# EAGLE board carte_moteurs_robotech (EAGLE 8.5.2)
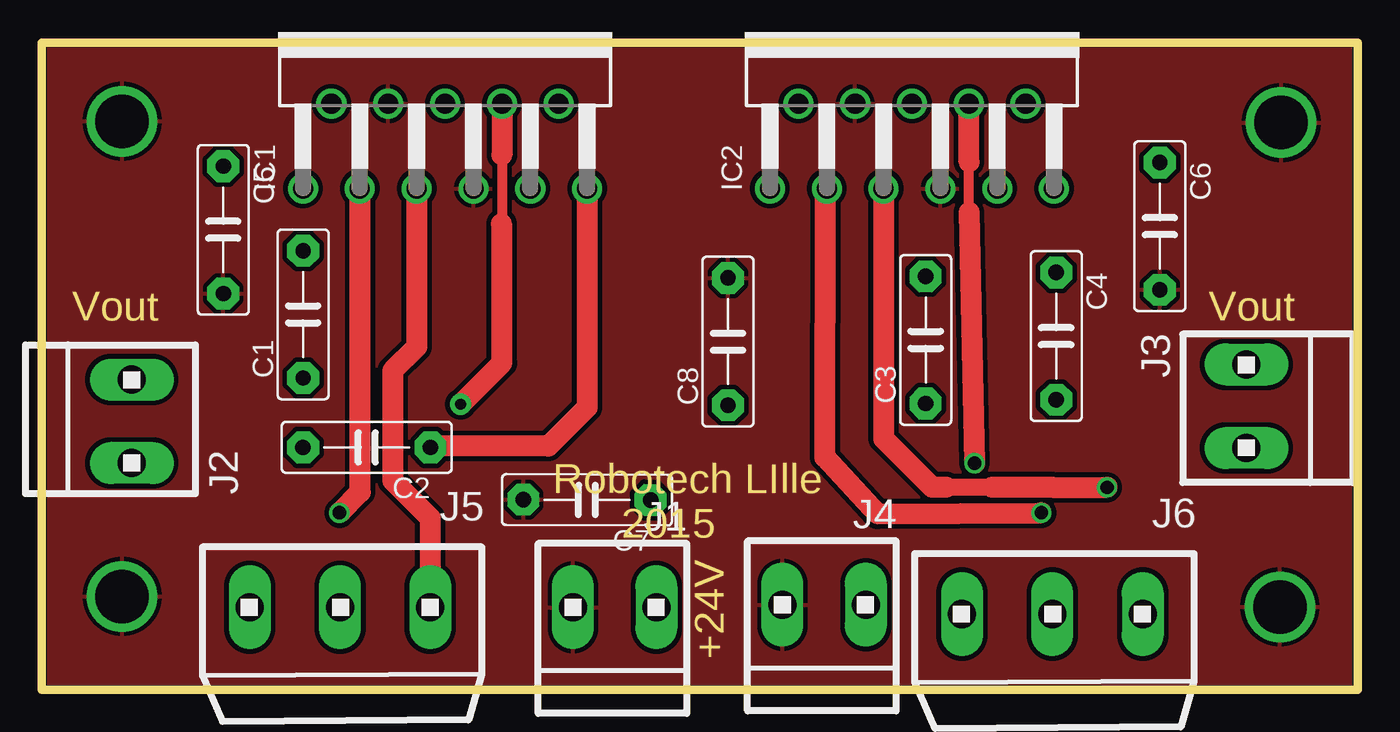
[diagram p0: board, top side]
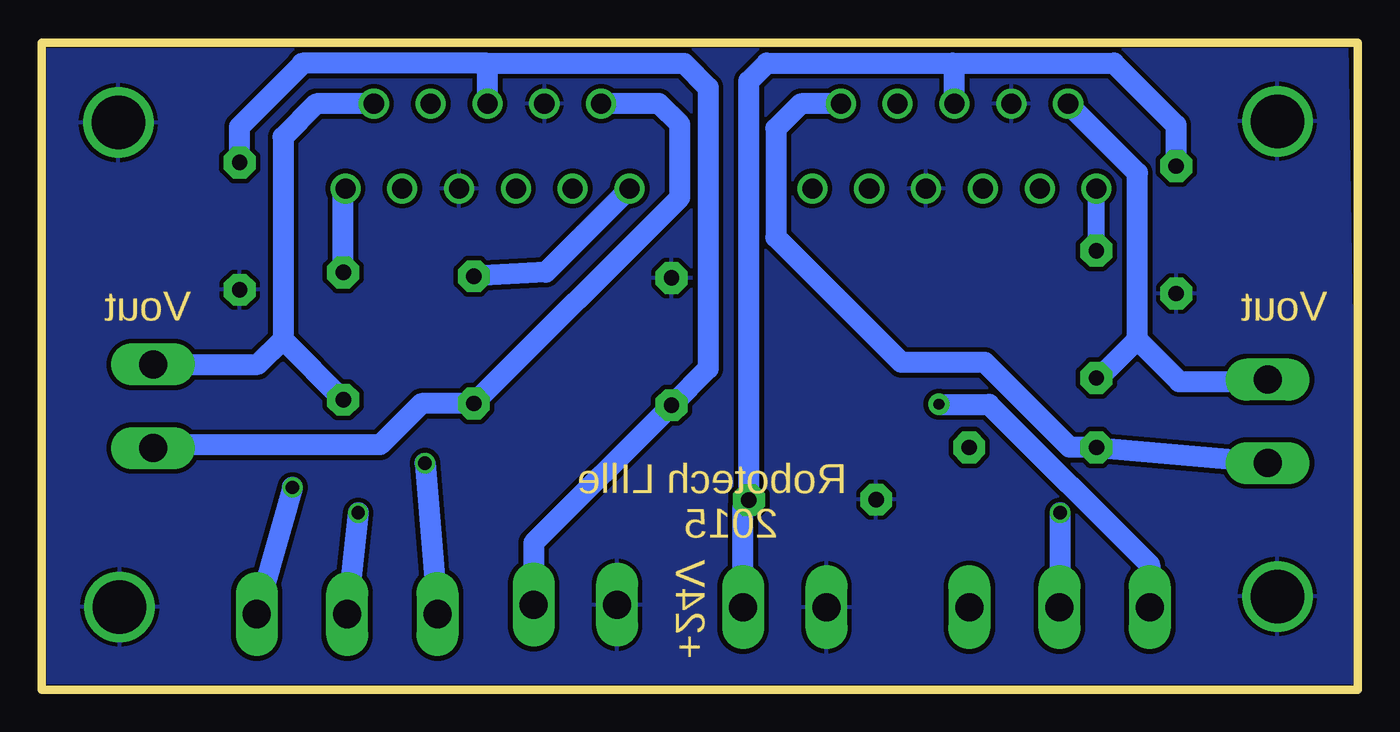
[diagram p1: board, bottom side, seen from below]

Size 78.74 x 38.73 mm. Coordinates in mm from the lower left corner, seen from the top.
Outline: 0,38.73 0,0 78.74,0 78.74,38.73 0,38.73
Copper layers (1*16): Top 0.035mm / dielectric 1.5mm / Bottom 0.035mm
Design rules "default *": minimum track width 10mil, minimum drill 24mil, track to track 11mil, track to pad 8mil, pad to pad 8mil, via to via 8mil, smd to smd 8mil, copper to edge 2mil, drill to drill 8mil, minimum pad ring 10mil, minimum via ring 8mil, stop-mask expansion 4mil, vias tented up to drill 0mil, thermal gap 10mil

## Footprints (pad centres in the part's own frame; a part is rotated, then mirrored left to right if it is on the bottom)
C7.5B3 = drill 0.914 pad 1.905 octagon: 1 -3.81,0; 2 3.81,0
TO-220-11 = drill 1.2: 1 -8.5,-9.37; 2 -6.8,-4.29; 3 -5.1,-9.37; 4 -3.4,-4.29; 5 -1.7,-9.37; 6 0,-4.29; 7 1.7,-9.37; 8 3.4,-4.29; 9 5.1,-9.37; 10 6.8,-4.29; 11 8.5,-9.37
MYJUMPER = drill 1.676 long: 1 2.5,0; 2 -2.5,0
1X3MTA = drill 1.676 long: 1 10.1,-0.1; 2 4.7,-0.1; 3 -0.7,-0.1
DRILL3ME = drill 3.2 pad 2.54: P$1 0,0

## Placement (x,y rotation side)
C1  10n  [C7.5B3]  15.64,22.47 90 top
C2  10n  [C7.5B3]  19.44,14.51 180 top
C3  10n  [C7.5B3]  52.89,20.94 90 top
C4  10n  [C7.5B3]  60.7,21.17 270 top
C5  100n  [C7.5B3]  10.86,27.53 270 top
C6  100n  [C7.5B3]  66.9,27.75 270 top
C7  100n  [C7.5B3]  32.62,11.37 179.8 top
C8  100n  [C7.5B3]  41.06,20.84 90 top
IC1  LM18200T  [TO-220-11]  24.13,39.37 0 top
IC2  LM18200T  [TO-220-11]  52.07,39.37 0 top
J1  [MYJUMPER]  34.28,4.94 180 top
J2  [MYJUMPER]  5.39,16.06 90 top
J3  [MYJUMPER]  72.08,16.97 270 top
J4  [MYJUMPER]  46.81,5.09 180 top
J5  [1X3MTA]  22.55,4.84 180 top
J6  [1X3MTA]  65.17,4.43 180 top
U$1  [DRILL3ME]  74.16,33.95 0 top
U$2  [DRILL3ME]  74.08,4.96 0 top
U$3  [DRILL3ME]  4.81,34.02 0 top
U$4  [DRILL3ME]  4.81,5.59 0 top

## Library data of the parts
C1-C8 = capacitor-wima
IC1 IC2 = national-semiconductor; OC_FARNELL: unknown; OC_NEWARK: unknown
J1-J4 = 1x2mta
J5 J6 = BOOM
U$1-U$4 = Eudil

## Nets
+24V: C5.1 C7.1 IC1.6 J1.2
DROITE_COURANT: IC2.8 J6.1
DROITE_PWM: IC2.5 J6.3
DROITE_S1: C3.1 IC2.2 J3.1
DROITE_S2: C4.2 IC2.10 J3.2
DROITE_SENS: IC2.3 J6.2
GAUCHE_COURANT: IC1.8 J5.1
GAUCHE_PWM: IC1.5 J5.3
GAUCHE_S1: C1.1 IC1.2 J2.1
GAUCHE_S2: C2.2 IC1.10 J2.2
GAUCHE_SENS: IC1.3
GND: C5.2 C6.2 C7.2 C8.2 IC1.4 IC1.7 IC2.4 IC2.7 J1.1 J4.1 U$1.P$1 U$2.P$1 U$3.P$1 U$4.P$1
N$2: C1.2 IC1.1
N$3: C2.1 IC1.11
N$8: C3.2 IC2.1
N$9: C4.1 IC2.11
V_BAT2: C6.1 C8.1 IC2.6 J4.2

## Tracks (layer width: path | path; a pad name or v marks a point on that pad's centre or on a via)
+24V
  Bottom 1.27: J1.2 36.78,11.01 C7.1 36.43,36.44 35.36,37.52 24.23,37.52 | 24.23,37.52 14.58,37.52 10.87,33.81 C5.1 | IC1.6 24.13,37.41 24.23,37.52
DROITE_COURANT  (via drill 0.8)
  Top 0.61: 55.48,28.59 55.48,31.59
  Top 1.27: 55.48,28.59 v55.81,13.57 | 55.48,31.59 IC2.8
  Bottom 1.27: v55.81,13.57 J6.1
DROITE_PWM  (via drill 0.8)
  Top 1.016: 56.87,12.14 54.13,12.14
  Top 1.27: IC2.5 50.37,15.03 53.26,12.14 54.13,12.14 | 56.87,12.14 60.45,12.14 60.48,12.11 v63.73,12.11
  Bottom 1.27: v63.73,12.11 J6.3
DROITE_S1
  Bottom 1.016: 41.81,35.09 41.82,35.08
  Bottom 1.27: 41.81,35.09 40.56,33.84 40.56,29.46 C3.1 56.02,17.13 58.5,14.66 71.89,14.66 J3.1 | 41.82,35.08 IC2.2
DROITE_S2
  Bottom 0.406: 59.21,35.08 IC2.10
  Bottom 1.27: IC2.10 62.32,35.08 64.31,33.09 64.31,20.97 | 64.31,20.97 C4.2 | J3.2 65.81,19.47 64.31,20.97
DROITE_SENS  (via drill 0.8)
  Top 1.016: 46.91,29.94 IC2.3
  Top 1.27: v59.81,10.59 50.01,10.54 46.86,13.92 46.91,29.94
  Bottom 1.27: v59.81,10.59 J6.2
GAUCHE_COURANT  (via drill 0.65 pad 1.27)
  Top 0.61: 27.53,32 27.53,27.91
  Top 1.016: 27.53,19.56 27.51,19.56 | 27.53,32 27.51,32 | 27.53,27.89 27.51,27.89 27.53,27.91
  Top 1.27: v25.06,17.09 27.53,19.56 | 27.51,27.89 27.51,19.56 | IC1.8 27.53,32
  Bottom 1.27: v25.06,17.09 22.06,17.09 12.45,7.48 J5.1
GAUCHE_PWM
  Top 1.27: IC1.5 22.43,20.53 21.01,19.1 21.01,12.52 23.25,10.28 J5.3
GAUCHE_S1
  Bottom 0.152: 5.5,18.45 J2.1
  Bottom 1.016: 15.28,18.45 C1.1 15.48,18.66
  Bottom 1.27: IC1.2 13.18,30.93 13.18,20.96 | 13.18,20.96 10.68,18.45 5.5,18.45 | 15.48,18.66 13.18,20.96
GAUCHE_S2
  Bottom 1.016: 15.61,14.49 C2.2
  Bottom 1.27: IC1.10 33.32,35.08 34.81,33.59 34.81,27.09 27.31,19.59 22.31,19.59 17.23,14.51 C2.2 | J2.2 15.61,14.49
GAUCHE_SENS  (via drill 0.8)
  Top 0.406: 19.05,29.98 IC1.3
  Top 1.016: 19.05,14.4 19.05,14.48
  Top 1.27: v17.81,10.59 19.05,11.83 19.05,14.4 | 19.05,14.48 19.05,29.98
  Bottom 1.27: v17.81,10.59 17.81,5.29
GND
  Bottom 0.406: IC1.7 25.81,30 | IC2.4 48.69,35.08
  pour Top: 0,38.73 0,0 78.74,0 78.74,38.73
  pour Bottom: 0.64,38.73 0,0 78.74,0 79.38,38.73
N$2
  Bottom 1.016: C1.2 IC1.1
N$3
  Top 0.406: 23.33,14.59 C2.1
  Top 1.27: IC1.11 32.63,22.23 32.63,16.91 30.31,14.59 23.33,14.59
N$8
  Bottom 1.27: IC2.1 48.57,25 C3.2
N$9
  Bottom 0.406: 60.7,29.87 IC2.11
  Bottom 1.27: C4.1 60.7,29.87
V_BAT2
  Bottom 1.016: 63.17,37.49 63.17,37.43
  Bottom 1.27: IC2.6 52.07,37.49 | 52.07,37.49 63.17,37.49 | 52.07,37.49 40.31,37.49 38.86,36.04 38.86,19.23 C8.1 49.31,8.78 J4.2 | C6.1 66.9,33.7 63.17,37.43

## Text on the board
Milling: Vout | Vout | Robotech LIlle / 2015 | +24V
tDocu: LMT18200T / V0